# Altium PCB PCB1.PcbDoc
Units mm, origin at the board's own origin, x right, y up, seen from the top; angles counter-clockwise.
Board outline 35 x 35 mm, 2 copper layers (Top Layer, Bottom Layer), stack 1.671 mm thick; 19 components, 9 nets, 39 pads, 0 vias.
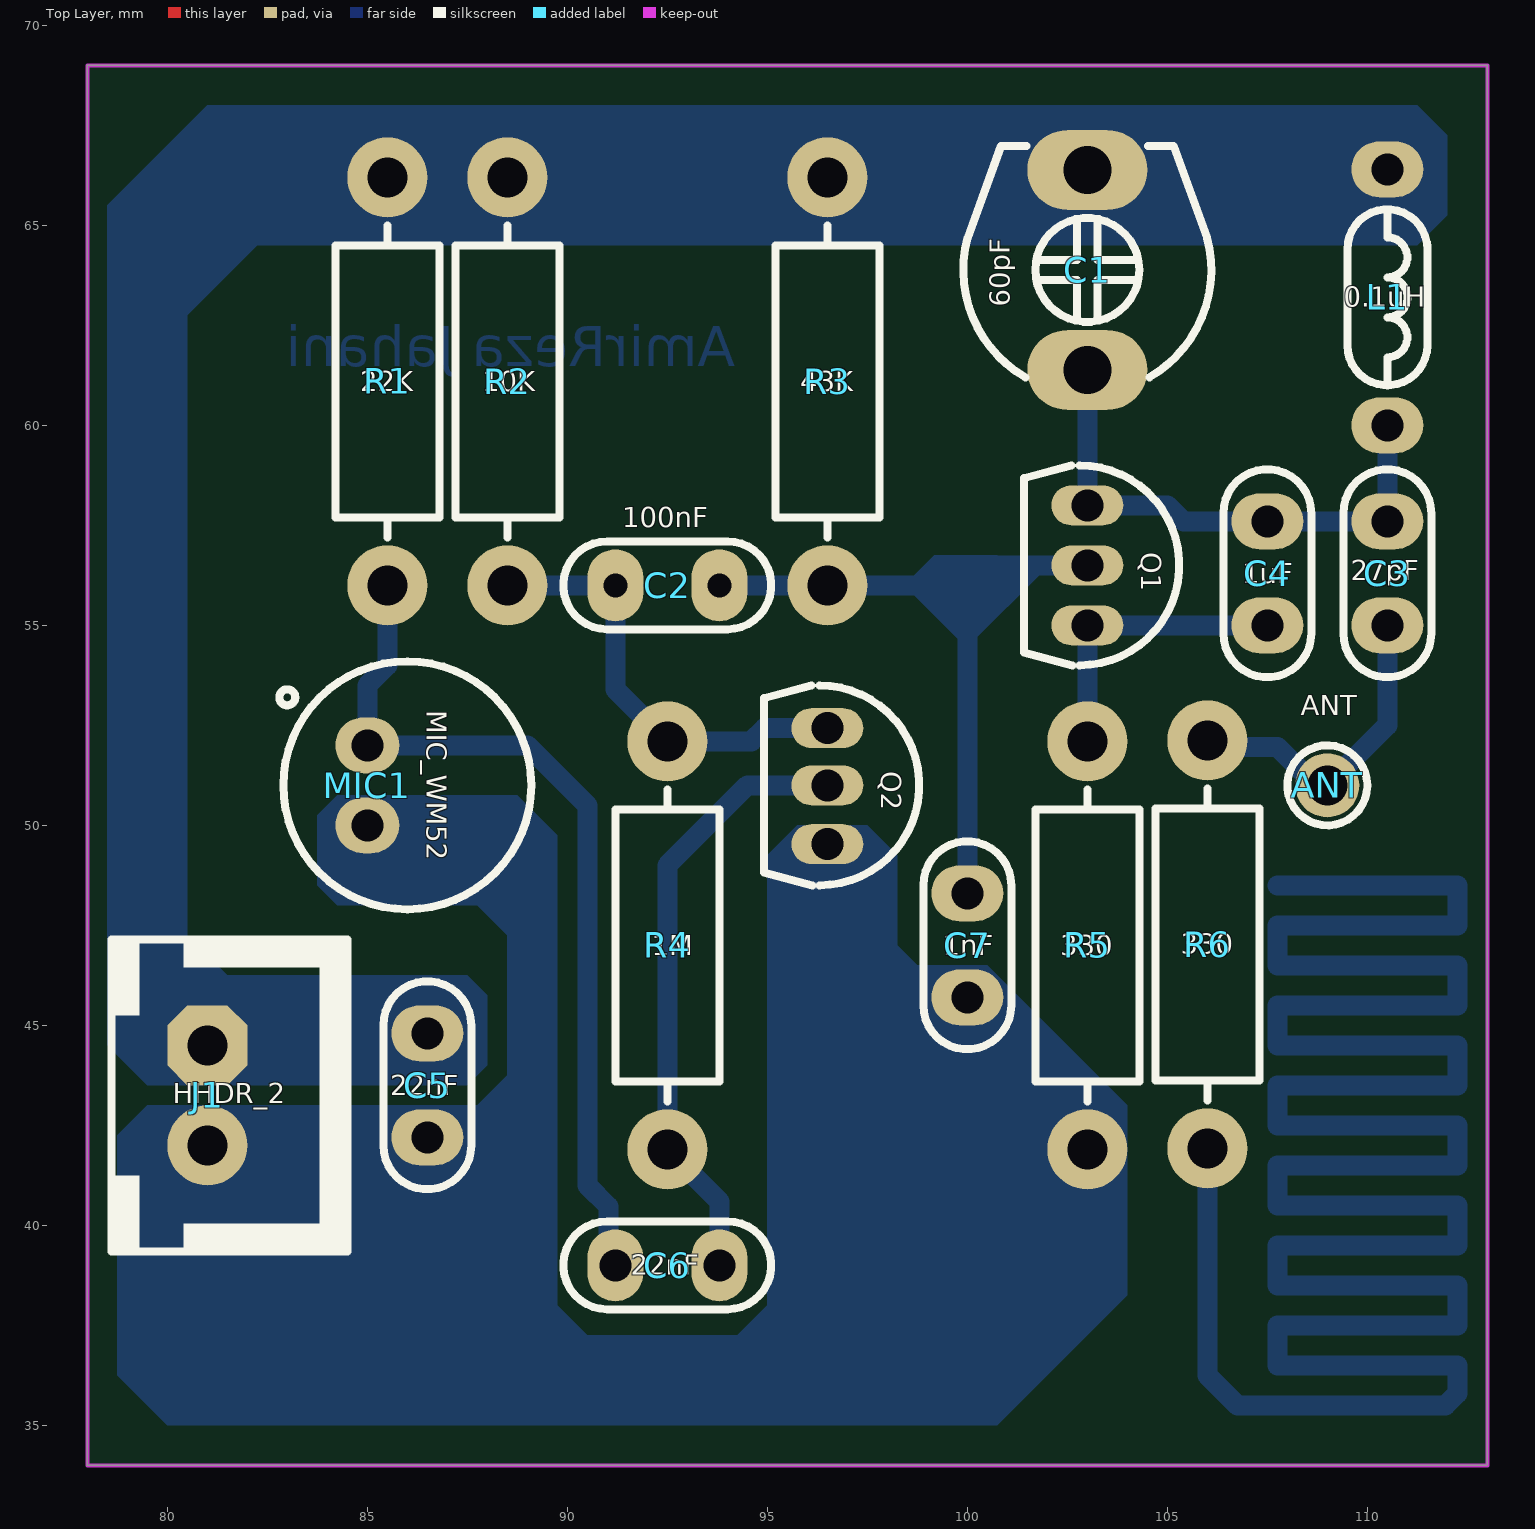
[diagram p0: Top Layer view]
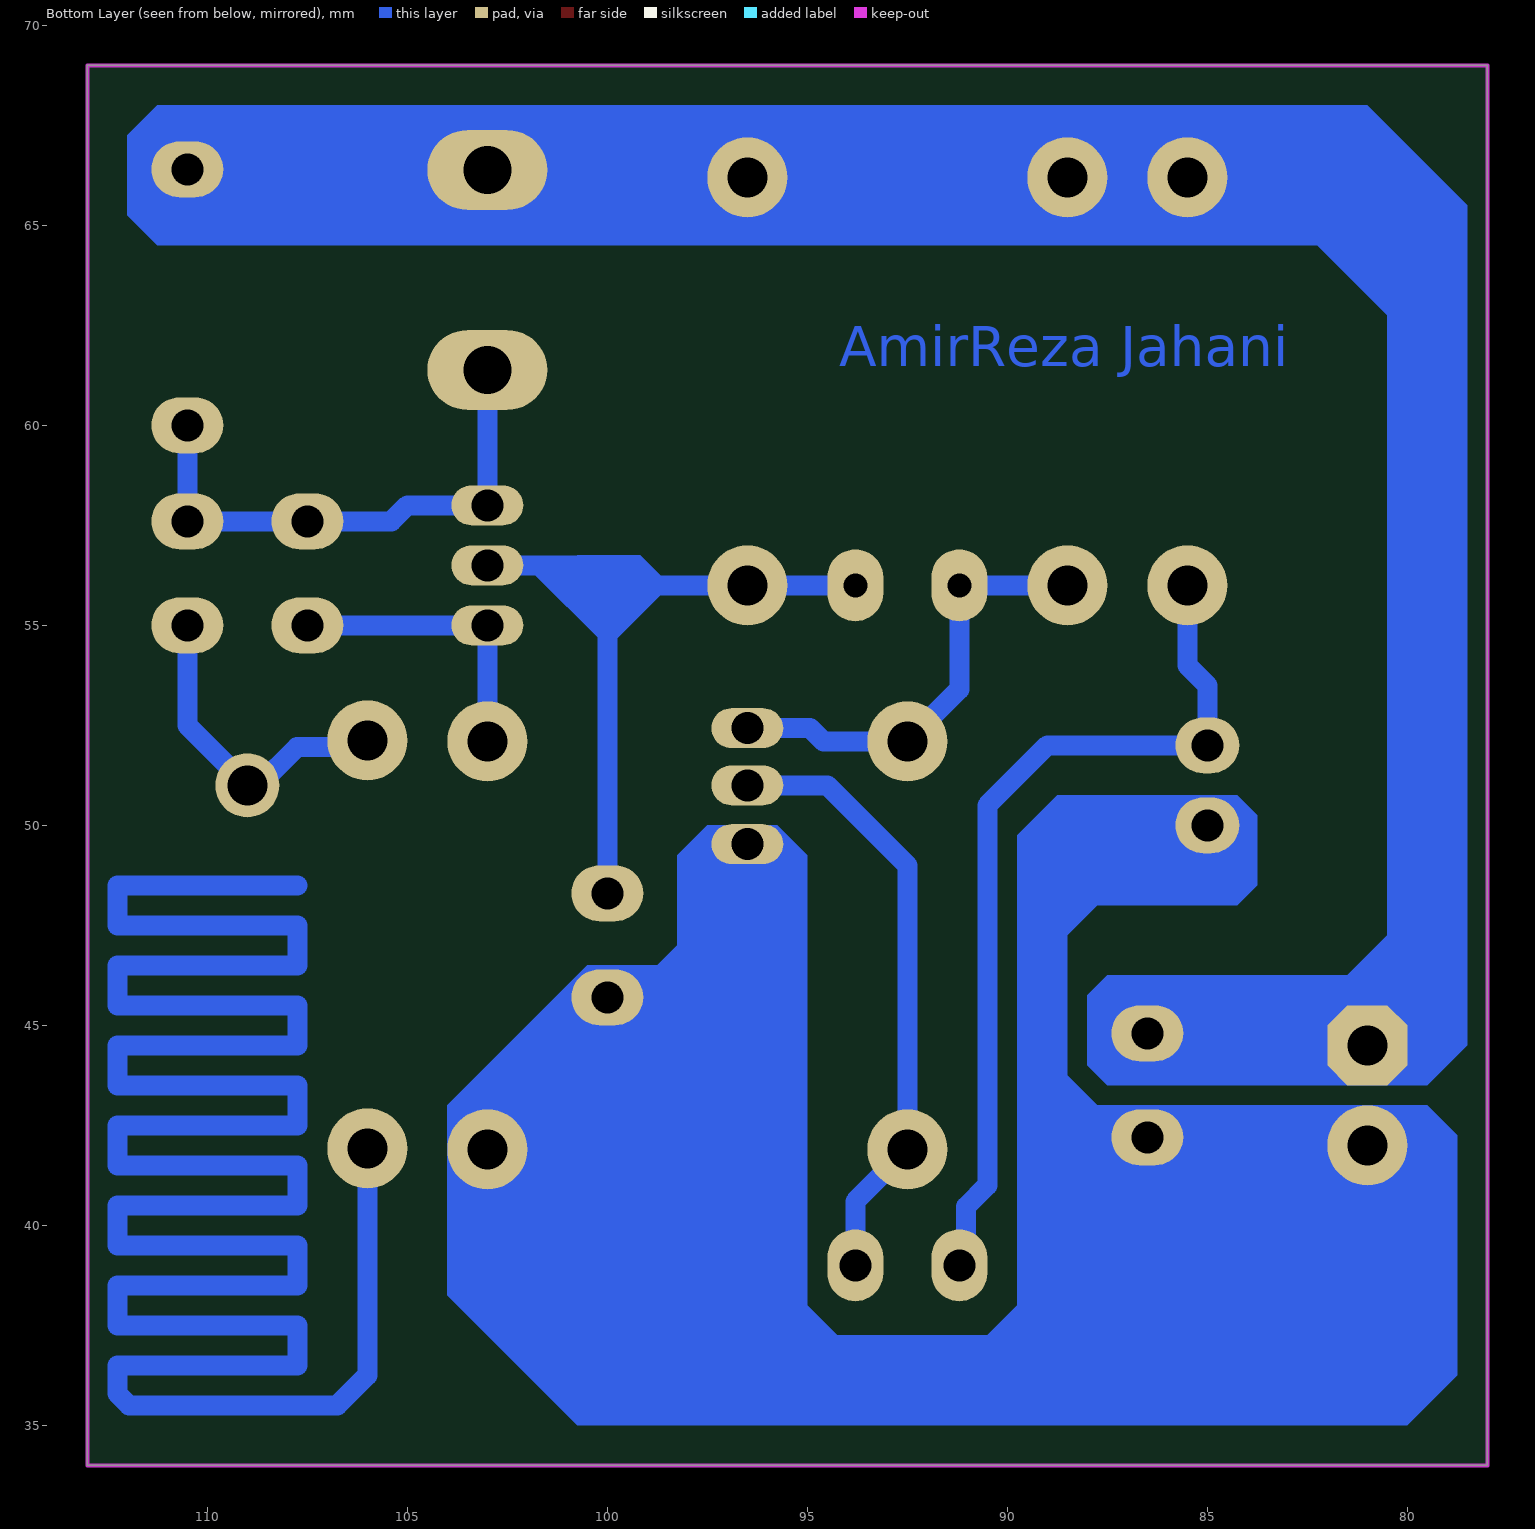
[diagram p1: Bottom Layer view, seen from below]
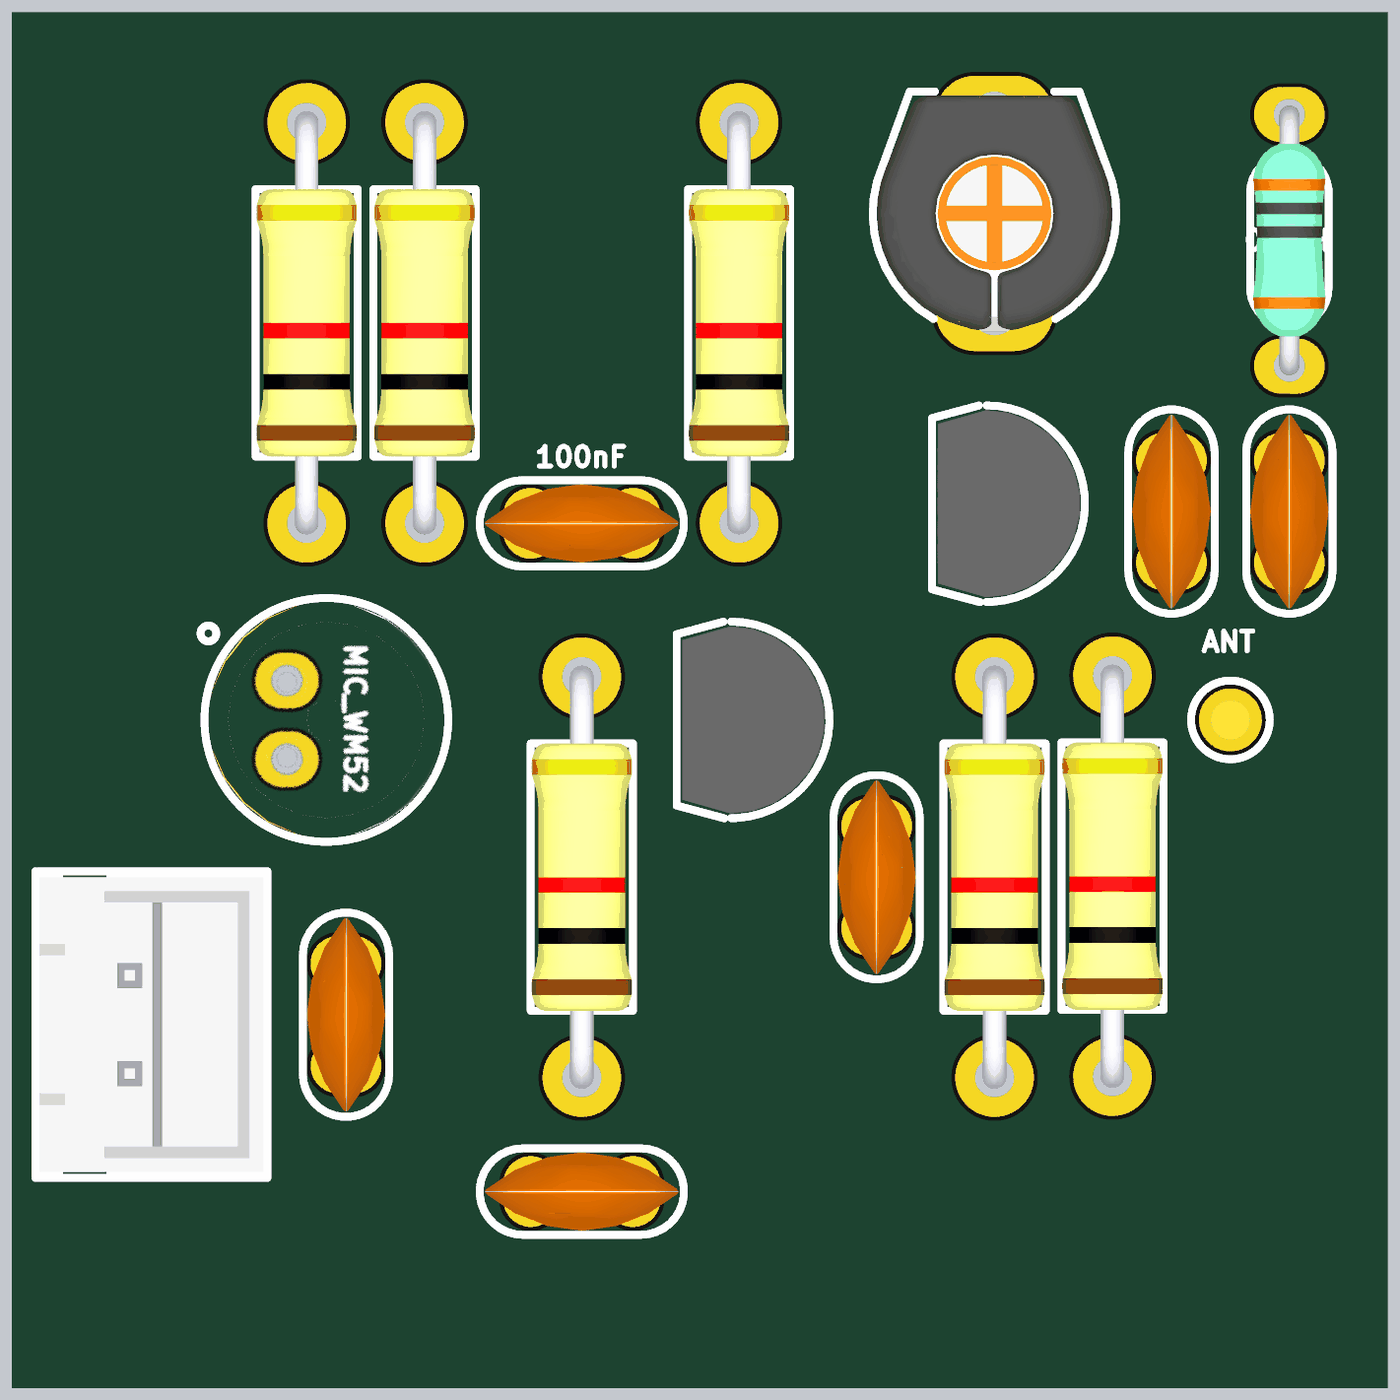
[diagram p2: 3D render of the assembled board from above, using the file's embedded part models]

## Layer stack, top to bottom
Top Solder: solder mask 0.0102, Solder Resist, Dk 3.5
Top Layer: signal copper 0.0356
Dielectric 1: dielectric 1.6, FR-4, Dk 4.8
Bottom Layer: signal copper 0.0356
Bottom Solder: solder mask 0.0102, Solder Resist, Dk 3.5

## Board outline
78,34 113,34 113,69 78,69

## Design rules (kind name [scope] priority, off if disabled: settings)
Clearance [All] p1: gap=0.4 ignorepadtopadclearanceinfootprint=FALSE except(0: Arc-Hole Track-Hole SMDPad-Hole THPad-Hole Via-Hole Fill-Hole Poly-Hole Region-Hole Text-Hole; 0.2: Arc-Text Track-Text SMDPad-Text THPad-Text Via-Text Fill-Text Poly-Text Region-Text Text-Text)
PolygonConnect [All] p1: connectstyle=Relief reliefconductorwidth=0.254 reliefentries=4 polygonreliefangle="90 Angle" airgapwidth=0.254
RoutingVias [All] p1: holewidth=0.711 width=1.27 viastyle="Through Hole" minholewidth=0.711 minwidth=1.27 maxholewidth=0.711 maxwidth=1.27
SolderMaskExpansion [All] p1: expansion=0.102 istentingtop=FALSE
Width [All] p1: maxlimit=1 minlimit=0.3 preferedwidth=0.8 minimp=50.000000 maximp=50.000000 favimp=50.000000
30 further rules are at their usual default settings.

## Classes and differential pairs
component class Sheet1: ANT C1 C2 C3 C4 C5 C7 J1 L1 MIC1 Q1 Q2 R1 R2 R3 R4 R5

## Components (designator, comment, footprint, x,y, rotation, side; value= is the part's Value field where it differs from the comment)
ANT "ANT" TPTHD_A 109,51 r0 top value=VALUE
C1 "60pF" CTRM_6X6 103,63.885 r90 top
C2 "100nF" C_CER_D5#1 92.5,56 r180 top
C3 "27pF" C_CER_D5#2 110.5,56.3 r270 top
C4 "1uF" C_CER_D5#2 107.5,56.3 r90 top
C5 "22nF" C_CER_D5#2 86.5,43.5 r90 top
C6 "22nF" C_CER_D5#2 92.5,39 r180 top
C7 "1nF" C_CER_D5#2 100,47 r90 top
J1 "HHDR_2" XH_2 81,43.25 r270 top
L1 "0.1uH" LT_AX025 110.5,63.2 r270 top
MIC1 "MIC_WM52" MIC_C6 86,51 r0 top
Q1 "BC547" TO92_3#1 103,56.5 r270 top
Q2 "BC547" TO92_3#2 96.5,51 r270 top
R1 "22K" R025W_AX04#1 85.5,61.1 r90 top
R2 "10K" R025W_AX04#1 88.5,61.1 r90 top
R3 "43K" R025W_AX04#1 96.5,61.1 r90 top
R4 "1M" R025W_AX04#1 92.5,47 r90 top
R5 "330" R025W_AX04#2 103,47 r90 top
R6 "330" R025W_AX04#2 106,47.025 r90 top (schematic designator R5)

## Footprints (in the part's own frame and the unit in brackets; to place one, negate y for a bottom-side part, rotate by r counter-clockwise, add the part's x,y. Pads: shape width x height; smd on the part's side, far side on the other; paste and mask are expansions set on the pad)
C_CER_D5#1 [mm] "CAP, CER, D:5mm, pitch: 2.5mm"
  oval 1.4x1.8 hole 0.6: 1(-1.3,0) 2(1.3,0)
  silkscreen extent -2.6,-1.1 2.6,1.1, body extent -2.46,-1 2.46,1, height 5.45
C_CER_D5#2 [mm] "CAP, CER, D:5mm, pitch: 2.5mm"
  oval 1.4x1.8 hole 0.8: 1(-1.3,0) 2(1.3,0)
  silkscreen extent -2.6,-1.1 2.6,1.1, body extent -2.46,-1 2.46,1, height 5.45
CTRM_6X6 [mm] "CAP, TRIMMER, Murata TZ03"
  oval 2x3 hole 1.2: 1(-2.5,0) 2(2.5,0)
  silkscreen extent -2.68,-3.1 3.1,3.1, body extent -3,-3 3,3, height 4.8
LT_AX025 [mm] "INDUCTOR, Axial, 6.4mm,"
  oval 1.4x1.8 hole 0.8 mask+0.1: 1(-3.2,0) 2(3.2,0)
  silkscreen extent -2.2,-1 2.2,1, body extent -3.43,-0.92 3.43,0.92, height 1.92
MIC_C6 [mm] "MIC, WM-63PR, POM-3535P-3-R"
  oval 1.6x1.4 hole 0.8: 1(-1,1) 2(-1,-1)
  silkscreen extent -3.2,-3.1 3.1,3.1, body extent -3,-3 3,3, height 2.4
R025W_AX04#1 [mm] "RESISTOR 1/4 WATT, AXIAL0.4"
  round 2 hole 1: 1(-5.1,0) 2(5.1,0)
  silkscreen extent -3.9,-1.3 3.9,1.3, body extent -5.38,-1.28 5.38,1.28, height 2.6
R025W_AX04#2 [mm] "RESISTOR 1/4 WATT, AXIAL0.4"
  round 2 hole 1: 2(-5.1,0) 2(5.1,0)
  silkscreen extent -3.9,-1.3 3.9,1.3, body extent -5.38,-1.28 5.38,1.28, height 2.6
TO92_3#1 [mm] "TO-92, SOT54"
  oval 1x1.8 hole 0.8 mask+0.1: 1(-1.5,0) 2(0,0) 3(1.5,0)
  silkscreen extent -2.5,-1.59 2.5,2.3, body extent -2.38,-1.45 2.38,2.18, height 4.82
TO92_3#2 [mm] "TO-92, SOT54"
  oval 1x1.8 hole 0.8 mask+0.1: 1(-1.43,0) 2(0,0) 3(1.47,0)
  silkscreen extent -2.5,-1.59 2.5,2.3, body extent -2.38,-1.45 2.38,2.18, height 4.82
TPTHD_A [mm] "TEST POINT, SMALLEST SIZE"
  round 1.6 hole 1: 1(0,0)
  silkscreen extent -1,-1 1,1, body extent -0.5,-0.5 0.5,0.5, height 6.5
XH_2 [mm] "PW10-xx-M, JST-BxB-XH-A pitch: 2.5mm"
  oct 2x2 hole 1: 1(-1.25,0)
  round 2 hole 1: 2(1.25,0)
  silkscreen extent -3.9,-2.4 3.9,3.5, body extent -3.75,-2.3 3.75,3.4, height 7

## Part data
ANT: library part TESTPOINT_PROBE, "TEST POINT", MANF=MANF, MANF_P#=MANF_P#
C1: library part CAP_THD_TRIMMER, "CAP, THD, TRIMMER", ASSEMBLY=ASSEMBLY, DESC="CAP, SMD, TRIMMER", MANF=MANF, MANF_P#=MANF_PART#, PARAM=PARAM, PARAM2=PARAM2, PRICE="100= 1$"
C2 C3 C4 C5 C6 C7: library part CAP_THD_CER, "CAP, THD, CER MULTI LAYER,", ASSEMBLY=ASSEMBLY, DESC="CAP, CER MULTI LAYER,", MANF=MANF, MANF_P#=MANF_PART#, PARAM2=50V, PRICE="100= 1$"
J1: library part XH_2, "JST-XH pitch: 2.5mm"
L1: library part IND_THD, "INDUCTOR, THD"
MIC1: library part MIC_WM-52, "MICROPHONE OMNI", MANF_P#=WM52BM, PRICE=PRICE
Q1 Q2: library part NPN_BC547_TO92, "BJT, NPN, 45v, 0.1A, THD, TO92", MANF=FAIRCHILD, MANF_P#=BC547, PARAM="0.1A, Hfe110~800", PARAM2="45v, 500mW"
R1 R2 R3 R4 R5 R6: library part RES_THD, "RESISTOR, THD", ASSEMBLY=ASSEMBLY, DESC=DESCRIPTION, DIST#=MOUSER, MANF="KOA SPEER", MANF_P#=RK73H1ETTP4701F, PARAM=0.063W, PARAM2=1%, PRICE="100= 0.5$"

## Nets (pads, with @x,y where several pads share a name; then routed paths per layer and width w, separated by ;. In a path a pad name is that pad's centre, name@x,y a point inside that pad or via, vN(x,y) a via of type N, cw(c..) or ccw(c..) an arc to the next point about the centre after c; other vN are vias at no path point)
ANT: ANT.1 C3.2 R6.2@106,52.125 | length 8.1
  Bottom Layer w0.5: R6.2@106,52.125 106.173,51.952 107.76,51.952 108.713,51 ANT.1 110.5,52.5 C3.2
GND: C5.1 C7.1 J1.2 MIC1.2 Q2.3 R5.2@103,41.9
NetC1_1: C1.1 C3.1 C4.2 L1.2 Q1.1 | length 13.5
  Bottom Layer w0.5: C1.1 103,58 105,58 105.4,57.6 C3.1 L1.2
NetC2_1: C2.1 C7.2 Q1.2 R3.1 | length 17.3
  Bottom Layer w0.5: C2.1@93.8,55.8 C2.1 R3.1 100,56 ; C7.2 100,56 ; Q1.2 100.5,56.5 100,56
NetC2_2: C2.2 Q2.1 R2.1 R4.2 | length 11.3
  Bottom Layer w0.5: R2.1 C2.2 91.2,53.4 R4.2 94.6,52.1 94.93,52.43 Q2.1
NetC4_1: C4.1 Q1.3 R5.2@103,52.1 | length 7.4
  Bottom Layer w0.5: R5.2@103,52.1 Q1.3 ; Q1.3 C4.1@107.5,55
NetC6_1: C6.1 Q2.2 R4.1 | length 15.4
  Bottom Layer w0.5: C6.1 93.8,40.6 R4.1 92.5,49 94.5,51 Q2.2
NetC6_2: C6.2 MIC1.1 R1.1 | length 22.1
  Bottom Layer w0.5: R1.1 85.5,54 85,53.5 MIC1.1 89,52 90.5,50.5 90.5,41 91.028,40.472 91.028,39.172 C6.2
VCC: C1.2 C5.2 J1.1 L1.1 R1.2 R2.2 R3.2
pads on no net: R6.2@106,41.925
copper on no net: | length 83.6
  Bottom Layer w0.5: 106,41.925 106,36.25 106.75,35.5 111.957,35.5 112.25,35.793 112.25,36.5 107.75,36.5 107.75,37.5 112.25,37.5 112.25,38.5 107.75,38.5 107.75,39.5 112.25,39.5 112.25,40.5 107.75,40.5 107.75,41.5 112.25,41.5 112.25,42.5 107.75,42.5 107.75,43.5 112.25,43.5 112.25,44.5 107.75,44.5 107.75,45.5 112.25,45.5 112.25,46.5 107.75,46.5 107.75,47.5 112.25,47.5 112.25,48.5 111.75,48.5 107.75,48.5

## Keep-outs
Keep-Out Layer:
  the board outline again, w0.1

## Other copper
Bottom Layer:
  region net GND: 87.75,43 79.5,43 78.75,42.25 78.75,36.25 80,35 100.75,35 104,38.25 104,43 100.5,46.5 98.75,46.5 98.25,47 98.25,49.25 97.5,50 95.75,50 95,49.25 95,38 94.25,37.25 90.5,37.25 89.75,38 89.75,49.75 88.75,50.75 84.25,50.75 83.75,50.25 83.75,48.5 84.25,48 87.75,48 88.5,47.25 88.5,43.75
  region net VCC: 87.5,43.5 88,44 88,45.75 87.5,46.25 81.5,46.25 80.5,47.25 80.5,62.75 82.25,64.5 111.25,64.5 112,65.25 112,67.25 111.25,68 81,68 78.5,65.5 78.5,44.5 79.5,43.5
  region net NetC2_1: 100.75,56.75 99.173,56.75 98.423,56 99.965,54.458 100,54.458 101.983,56.442
  text "AmirReza Jahani" at 94.199,61.476 h1

## Silkscreen, mask and mechanical layers (free items; w line width, h text height)
Top Overlay:
  drawing of 142 lines, arcs and shapes, not listed